# Altium PCB PCB1.PcbDoc
Units mm, origin at the board's own origin, x right, y up, seen from the top; angles counter-clockwise.
Board outline 40 x 26 mm, 2 copper layers (Top Layer, Bottom Layer); 62 components, 43 nets, 196 pads, 0 vias.
Unrouted connection lines stored in the file: 128.
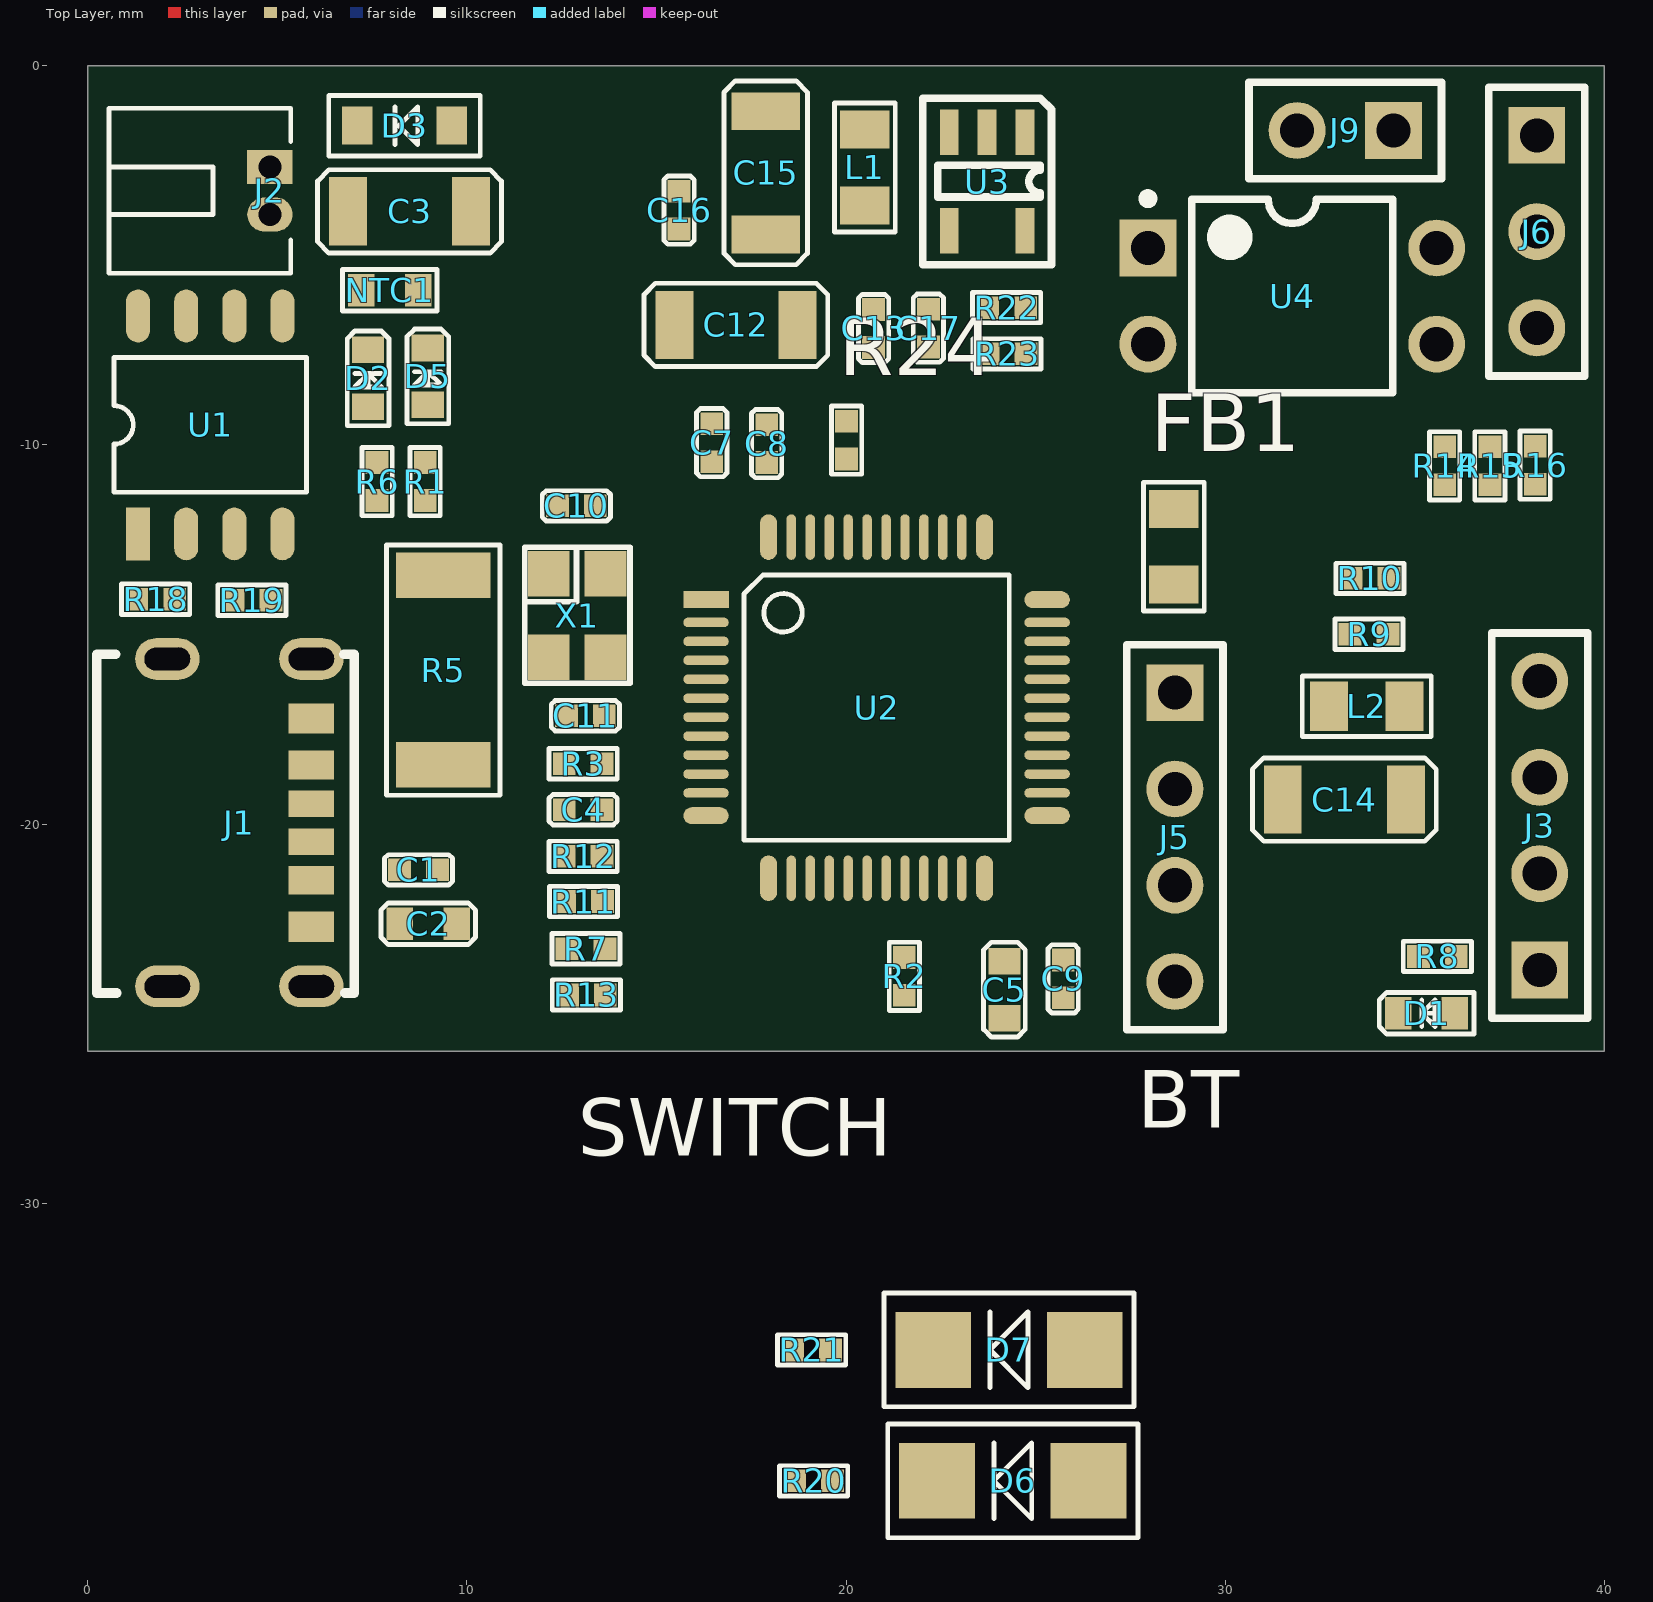
[diagram p0: Top Layer view]
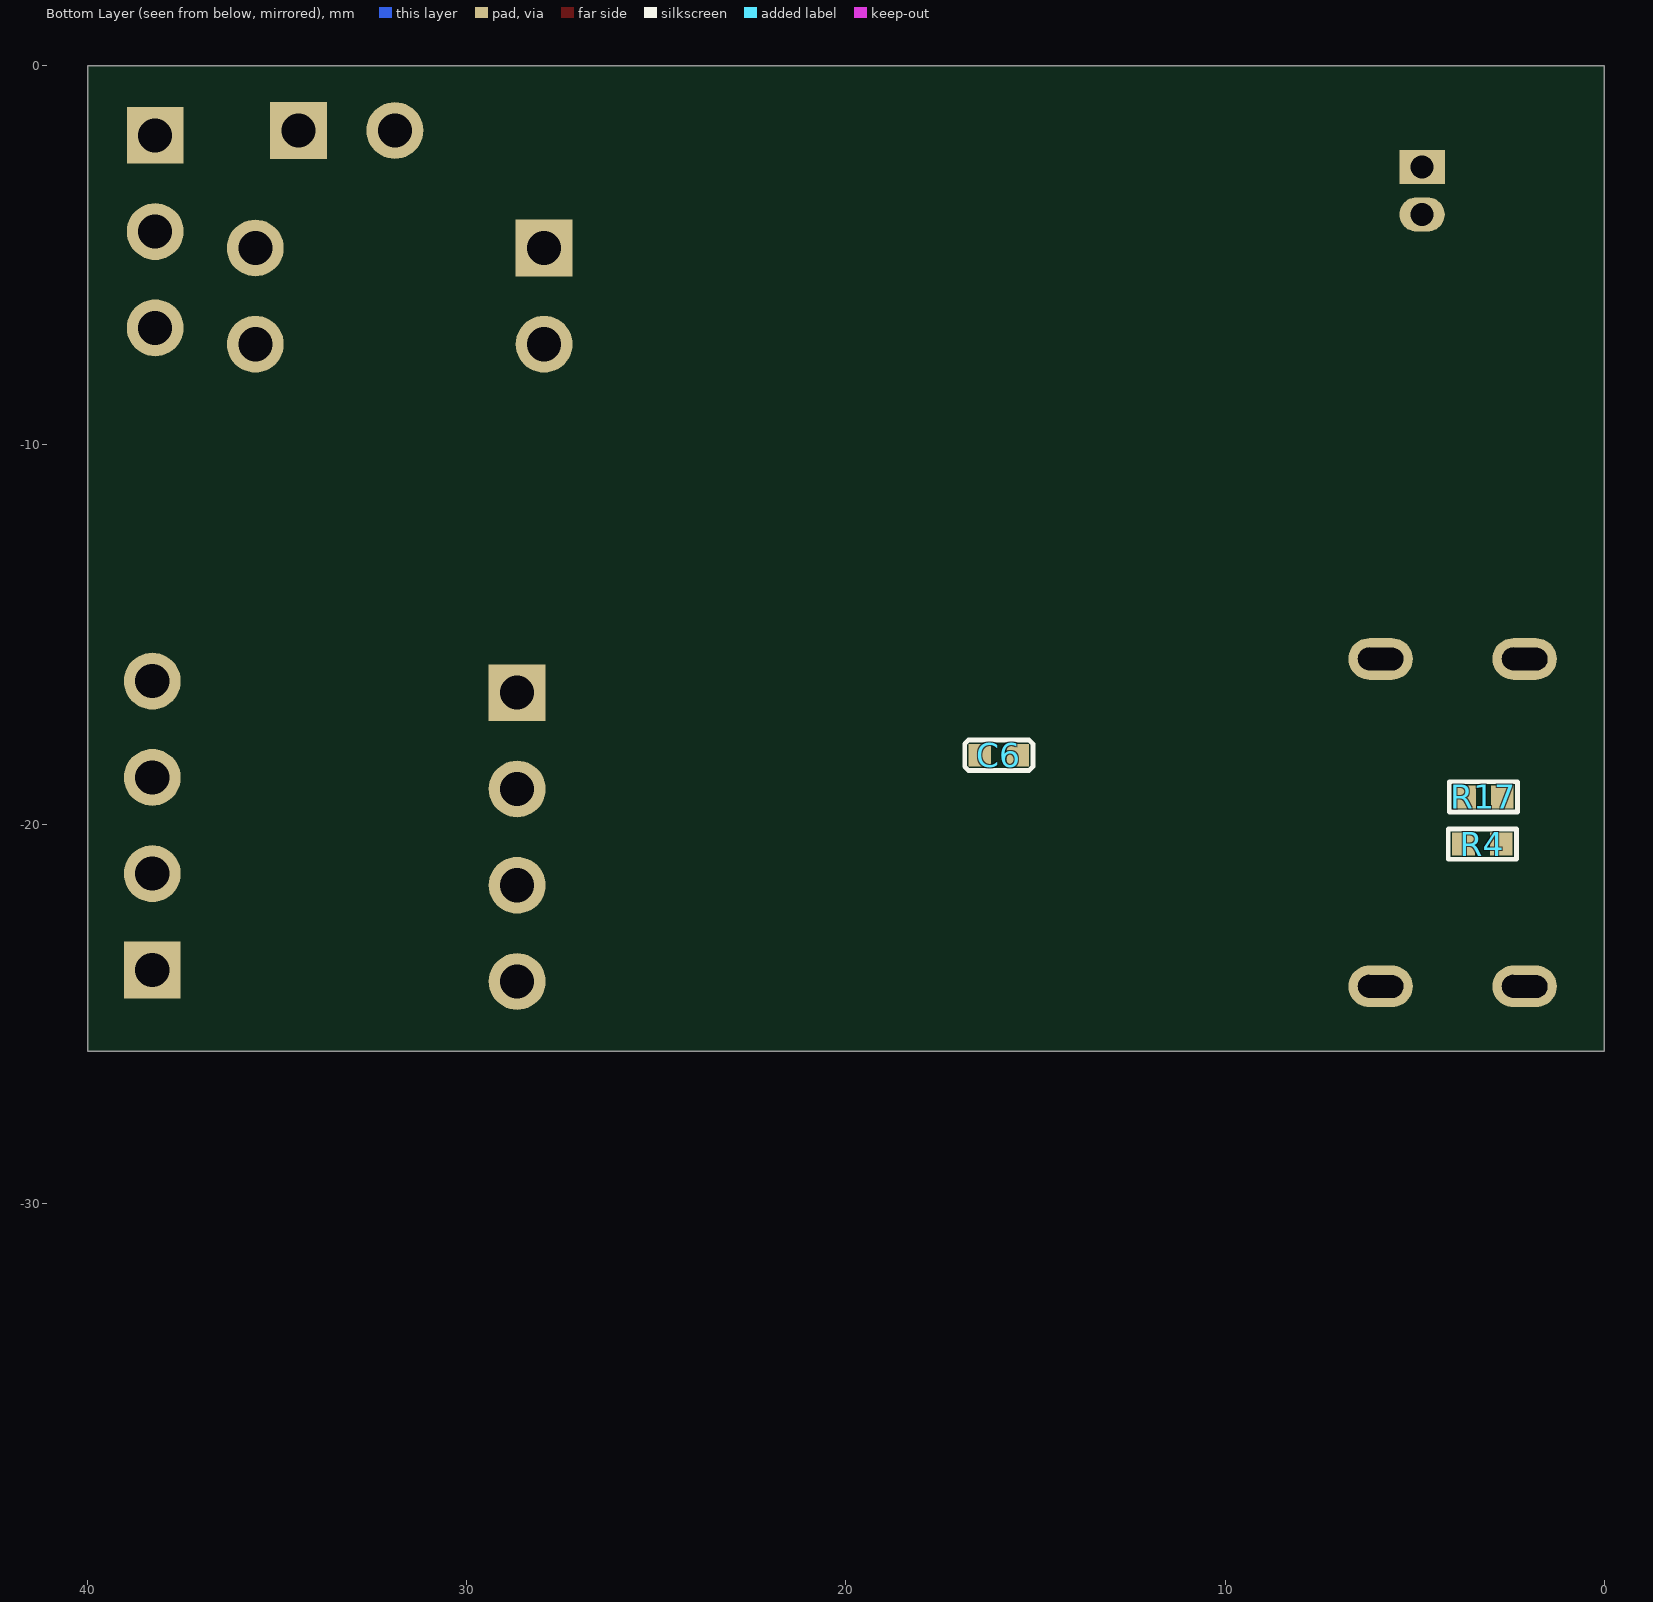
[diagram p1: Bottom Layer view, seen from below]

## Layer stack, top to bottom
Top Layer: signal copper 0.0356
Dielectric: dielectric 0.32, FR-4, Dk 4.8
Bottom Layer: signal copper 0.0356

## Board outline
0,-26 40,-26 40,0 0,0

## Design rules (kind name [scope] priority, off if disabled: settings)
Clearance [All] p1: gap=0.254
PolygonConnect [All] p1: connectstyle=Relief reliefconductorwidth=0.254 reliefentries=4 polygonreliefangle="90 Angle"
RoutingVias [All] p1: holewidth=0.711 width=1.27 viastyle="Through Hole" minholewidth=0.711 minwidth=1.27 maxholewidth=0.711 maxwidth=1.27
SilkscreenOverComponentPads [All] p1: minsilkscreentomaskgap=0.254
SolderMaskExpansion [All] p1: expansion=0.102
Width [All] p1: maxlimit=0.254 minlimit=0.254 preferedwidth=0.254
27 further rules are at their usual default settings.

## Classes and differential pairs
component class mcu: C4 C5 C6 C7 C8 C9 C10 C11 D1 FB1 J3 J5 J6 R2 R3 R7 R8 R9 R10 R11 R12 R13 R14 R15 R16 R24 S2 U2 U4 X1
component class power: C1 C2 C3 C12 C13 C14 C15 C16 C17 D2 D3 D5 D6 D7 J1 J2 J9 L1 L2 NTC1 R1 R4 R5 R6 R17 R18 R19 R20 R21 R22 R23 S3 U1 U3

## Components (designator, comment, footprint, x,y, rotation, side; value= is the part's Value field where it differs from the comment)
C1 "0.1uF/10V" 0402C 9.22,-21.209 r180 top
C2 "10uF/10V" 0603C 9.728,-22.631 r180 top
C3 "22uF/10V" 1206C 6.858,-3.835 r0 top
C4 "0.1uF/10V" 0402C 12.564,-19.625 r0 top
C5 "10uF/10V" 0603C 24.181,-25.121 r90 top
C6 "0.1uF/10V" 0402C 15.469,-18.186 r0 bottom
C7 "0.1uF/10V" 0402C 16.459,-9.439 r270 top
C8 "0.1uF/10V" 0402C 17.907,-9.465 r270 top
C9 "0.1uF/10V" 0402C 25.73,-24.587 r90 top
C10 "22P" 0402C 13.386,-11.606 r180 top
C11 "22P" 0402C 12.624,-17.145 r0 top
C12 "100uF/10v" 1206C 18.72,-6.833 r180 top
C13 "0.1uF/10V" 0402c 20.726,-6.426 r270 top
C14 "100uF/10v" 1206C 34.773,-19.355 r180 top
C15 "100uF/10V" 1206C 17.882,-1.194 r270 top
C16 "0.1uF/10V" 0402C 15.596,-3.302 r270 top
C17 "5pF/10V" 0402C 22.174,-7.417 r90 top
D1 "" 0603LED 36.068,-24.994 r180 top
D2 "" 0603LED 7.391,-8.992 r90 top
D3 "MM3Z5V1" SOD323 9.601,-1.575 r180 top
D5 "" 0603LED 8.966,-8.941 r90 top
D6 "SS14" SMA 26.401,-37.33 r180 top
D7 "SS14" SMA 26.3,-33.876 r180 top
FB1 "FB" 0805CZ 28.651,-11.684 r270 top
J1 "TYPE C_6P" TYPEC_6P 5.893,-19.964 r270 top
J2 "Header 2" 2X1.25MMW 4.801,-2.667 r270 top
J3 "Header 4" HDR1X4 38.303,-23.851 r90 top
J5 "Header 4" HDR1X4 28.677,-16.535 r270 top
J6 "Header 3" HDR1X3 38.227,-1.829 r270 top
J9 "Header 2" HDR1X2 34.442,-1.702 r180 top
L1 "4.7uH" 0805r 20.498,-1.676 r270 top
L2 "4.7uH" 0805r 32.741,-16.891 r0 top
NTC1 "SDN1608X103F3950FTF" 0603R 8.712,-5.918 r180 top
R1 "1K" 0402R 8.896,-10.465 r270 top
R2 "100K" 0402R 21.539,-23.52 r270 top
R3 "10K" 0402R 12.564,-18.412 r0 top
R4 "5.1K" 0402R 3.708,-20.53 r180 bottom
R5 "0.4/3/4W" 2010R 9.373,-18.44 r90 top
R6 "1K" 0402R 7.626,-10.465 r270 top
R7 "20K" 0402R 13.64,-23.292 r180 top
R8 "1K" 0402R 35.103,-23.495 r0 top
R9 "10K" 0402R 33.299,-14.992 r0 top
R10 "10K" 0402R 33.325,-13.519 r0 top
R11 "10K/1%" 0402R 12.573,-22.047 r0 top
R12 "10K/1%" 0402R 13.564,-20.853 r180 top
R13 "10K" 0402R 12.649,-24.511 r0 top
R14 "120" 0402R 35.795,-11.049 r90 top
R15 "10K" 0402R 36.989,-11.049 r90 top
R16 "10K" 0402R 38.183,-10.033 r270 top
R17 "5.1K" 0402R 3.683,-19.285 r180 bottom
R18 "5.6K/1%" 0402R 2.286,-14.072 r180 top
R19 "4K/1%" 0402R 4.826,-14.097 r180 top
R20 "10K" 0402R 19.645,-37.33 r180 top
R21 "10K" 0402R 19.594,-33.876 r180 top
R22 "24K/1%" 0402R 24.74,-6.375 r180 top
R23 "5.1K/1%" 0402R 23.749,-7.595 r0 top
R24 "100K" 0402R 20.015,-9.373 r270 top
U1 "TP4056" so-8 1.321,-12.344 r90 top
U2 "STM32F103C8T6" TQFP-48 16.307,-14.681 r0 top
U3 "PAM2312" SOT-23-5 23.724,-3.048 r270 top
U4 "PC817B" DIP-4 31.775,-6.071 r0 top
X1 "8M" XTAL4TN_3225 12.903,-14.502 r270 top

## Footprints (in the part's own frame and the unit in brackets; to place one, negate y for a bottom-side part, rotate by r counter-clockwise, add the part's x,y. Pads: shape width x height; smd on the part's side, far side on the other; paste and mask are expansions set on the pad)
2X1.25MMW [mm]
  rect 0.9x1.2 hole 0.6: 1(0,0)
  oval 0.9x1.2 hole 0.6: 2(1.25,0)
  silkscreen extent -1.55,-4.25 2.8,0.55
0402C [mm]
  rect 0.6x0.6 smd: 1(0,0) 2(1,0)
  silkscreen extent -0.4,-0.4 1.4,0.4
0402c [mm]
  rect 0.6x0.6 smd: 1(0,0) 2(1,0)
  silkscreen extent -0.4,-0.4 1.4,0.4
0402R [mm]
  rect 0.6x0.6 smd: 1(0,0) 2(1,0)
  silkscreen extent -0.4,-0.4 1.4,0.4
0603C [mm]
  rect 0.7x0.85 smd: 1(0,0) 2(1.5,0)
  silkscreen extent -0.5,-0.55 2,0.55
0603LED [mm]
  rect 0.7x0.85 smd: 1(0,0) 2(1.5,0)
  silkscreen extent -0.5,-0.55 2,0.55
0603R [mm]
  rect 0.7x0.85 smd: 1(0,0) 2(1.5,0)
  silkscreen extent -0.5,-0.55 2,0.55
0805CZ [mm]
  rect 1x1.3 smd: 1(0,0) 2(2,0)
  silkscreen extent -0.7,-0.8 2.7,0.8
0805r [mm]
  rect 1x1.3 smd: 1(0,0) 2(2,0)
  silkscreen extent -0.7,-0.8 2.7,0.8
1206C [mm]
  rect 1x1.8 smd: 1(0,0) 2(3.25,0)
  silkscreen extent -0.8,-1.1 4.05,1.1
2010R [mm]
  rect 1.2x2.5 smd: 1(0,0) 2(5,0)
  silkscreen extent -0.8,-1.5 5.8,1.5
DIP-4 [mm] "DIP; 4 Leads; Row Spacing 7.62 mm; Pitch 2.54 mm"
  rect 1.5x1.5 hole 0.9: 1(-3.81,1.27)
  round 1.5 hole 0.9: 2(-3.81,-1.27) 3(3.81,-1.27) 4(3.81,1.27)
  silkscreen extent -3.93,-2.55 2.65,2.69, body extent -3.15,-2.5 3.15,2.5, height 5.6
HDR1X2 [mm] "Connector; Header; 2 Position"
  rect 1.5x1.5 hole 0.9: 1(0,0)
  round 1.5 hole 0.9: 2(2.54,0)
  silkscreen extent -1.27,-1.27 3.81,1.27
HDR1X3 [mm] "Connector; Header; 3 Position"
  rect 1.5x1.5 hole 0.9: 1(0,0)
  round 1.5 hole 0.9: 2(2.54,0) 3(5.08,0)
  silkscreen extent -1.27,-1.27 6.35,1.27
HDR1X4 [mm] "Connector; Header; 4 Position"
  rect 1.5x1.5 hole 0.9: 1(0,0)
  round 1.5 hole 0.9: 2(2.54,0) 3(5.08,0) 4(7.62,0)
  silkscreen extent -1.27,-1.27 8.89,1.27
SMA [mm]
  rect 2x2 smd: 1(0,0) 2(4,0)
  silkscreen extent -1.3,-1.5 5.3,1.5
so-8 [mil]
  rect 55x25 smd: 1(0,0)
  oval 55x25 smd: 2(0,-50) 3(0,-100) 4(0,-150) 5(226.38,-150) 6(226.38,-100) 7(226.38,-50) 8(226.38,0)
  silkscreen extent 43,-175 183,25
SOD323 [mm]
  rect 0.8x1 smd: 1(0,0) 2(2.5,0)
  silkscreen extent -0.75,-0.8 3.25,0.8
SOT-23-5 [mm]
  rect 1.2x0.5 smd: 1(-1.3,1) 2(-1.3,0) 3(-1.3,-1) 4(1.3,-1) 5(1.3,1)
  silkscreen extent -2.2,-1.7 2.2,1.7
TQFP-48 [mm]
  rect 1.2x0.45 smd: 1(0,0.6)
  oval 1.2x0.25 smd: 2(0,0) 3(0,-0.5) 4(0,-1) 5(0,-1.5) 6(0,-2) 7(0,-2.5) 8(0,-3) 9(0,-3.5) 10(0,-4) 11(0,-4.5) 26(9,-4.5) 27(9,-4) 28(9,-3.5) 29(9,-3) 30(9,-2.5) 31(9,-2) 32(9,-1.5) 33(9,-1) 34(9,-0.5) 35(9,0)
  oval 1.2x0.45 smd: 12(0,-5.1) 25(9,-5.1) 36(9,0.6)
  oval 0.45x1.2 smd: 13(1.65,-6.75) 24(7.35,-6.75) 37(7.35,2.25) 48(1.65,2.25)
  oval 0.25x1.2 smd: 14(2.25,-6.75) 15(2.75,-6.75) 16(3.25,-6.75) 17(3.75,-6.75) 18(4.25,-6.75) 19(4.75,-6.75) 20(5.25,-6.75) 21(5.75,-6.75) 22(6.25,-6.75) 23(6.75,-6.75) 38(6.75,2.25) 39(6.25,2.25) 40(5.75,2.25) 41(5.25,2.25) 42(4.75,2.25) 43(4.25,2.25) 44(3.75,2.25) 45(3.25,2.25) 46(2.75,2.25) 47(2.25,2.25)
  silkscreen extent 1,-5.75 8,1.25
TYPEC_6P [mm]
  oval 1.1x1.7 hole 0.6 slot 1.2 at 90.6 deg: 1(-4.32,0) 1(-4.32,-3.8) 1(4.32,0) 1(4.32,-3.8)
  rect 0.7x1.2 smd: A5(-0.5,0) B5(0.5,0)
  rect 0.76x1.2 smd: A9(1.52,0) B9(-1.52,0)
  rect 0.8x1.2 smd: A12(2.75,0) B12(-2.75,0)
  silkscreen extent -4.44,-5.66 4.49,1.14
XTAL4TN_3225 [mm]
  rect 1.2x1.1 smd: 1(-1.1,-0.75) 2(1.1,-0.75) 3(1.1,0.75) 4(-1.1,0.75)
  silkscreen extent -1.8,-1.38 1.79,1.4

## Part data
C1 C2 C3 C4 C5 C6 C7 C8 C9 C10 C11 C12 C13 C14 C15 C16 C17: library part Cap, "Capacitor"
D1 D2 D5: library part LED0, "Typical INFRARED GaAs LED"
D3: library part "D Tunnel1", "Tunnel Diode - RLC Model"
D6 D7: library part Diode, "Default Diode"
FB1: "BLM21PG331SN1D"
J2 J9: "Header, 2-Pin"
J3 J5: "Header, 4-Pin"
J6: "Header, 3-Pin"
L1 L2: library part Inductor, "Inductor"
NTC1 R1 R3 R4 R5 R6 R7 R8 R9 R10 R11 R12 R13 R14 R15 R16 R17 R18 R19 R20 R21 R22 R23: library part "Res Semi", "Semiconductor Resistor"
R2 R24: library part Res1, "Resistor"
U2: library part STM32F103C6
U4: library part Optoisolator1, "4-Pin Phototransistor Optocoupler"
X1: library part CRYSTAL-4

## Nets (pads, with @x,y where several pads share a name; then routed paths per layer and width w, separated by ;. In a path a pad name is that pad's centre, name@x,y a point inside that pad or via, vN(x,y) a via of type N, cw(c..) or ccw(c..) an arc to the next point about the centre after c; other vN are vias at no path point)
AD_BAT_IN: R11.2 R12.1 U2.10
BATTERY: C3.1 C12.1 C13.1 D3.2 D7.1 J2.1 R11.1 R13.1 U1.5 U3.4
DM: U2.32
DP: U2.33
GND: C1.1 C2.1 C3.2 C4.1 C5.1 C6.1 C7.1 C8.1 C9.1 C10.1 C11.1 C12.2 C13.2 C14.2 C15.1 C16.1 D1.2 D3.1 J1.1 J1.A12 J1.B12 J2.2 J3.2 J5.2 J9.2 NTC1.2 R4.2 R7.2 R12.2 R16.1 R17.2 R19.1 R23.1 R24.1 U1.3 U2.8 U2.23 U2.35 U2.47 U3.2
LED: D1.1 R8.2
NetC17_1: C17.1 R22.1 R23.2 U3.5
NetD2_1: D2.1 R6.1
NetD2_2: D2.2 U1.7
NetD5_1: D5.1 R1.1
NetD5_2: D5.2 U1.6
NetD6_2: D6.2 R20.1
NetD7_2: D7.2 R21.1
NetFB1_2: FB1.2 J5.1
NetJ1_A5: J1.A5 R17.1
NetJ1_B5: J1.B5 R4.1
NetJ6_1: J6.1 U4.4
NetJ6_2: J6.2 U4.3
NetJ6_3: J6.3 R15.2
NetL1_1: L1.1 U3.3
NetNTC1_1: NTC1.1 R18.2 U1.1
NetR1_2: R1.2 R5.2 R6.2 R18.1 U1.4 U1.8
NetR2_1: R2.1 U2.20
NetR7_1: R7.1 R13.2
NetR8_1: R8.1 U2.46
NetR14_2: R14.2 U4.2
NetR19_2: R19.2 U1.2
NetR20_2: R20.2 R21.2
NetR24_2: R24.2 U2.44
NetS2_2: U2.25
NetS3_2: U3.1
NRST: C4.2 R3.2 U2.7
OSCIN: C10.2 U2.5 X1.1
OSCOUT: C11.2 U2.6 X1.3
PEN_LED_IN: R15.1 R16.2 U2.18
PEN_SWITCH_OUT: R14.1 U2.17
RXD2: J5.4 U2.13
SWCLK: J3.3 R9.2 U2.37
SWDIO: J3.4 R10.2 U2.34
TXD2: J5.3 U2.12
VCC_3.3V: C5.2 C6.2 C7.2 C8.2 C9.2 C15.2 C16.2 C17.2 FB1.1 J3.1 L1.2 L2.1 R2.2 R3.1 R9.1 R10.1 R22.2 U2.1 U2.9 U2.24 U2.36 U2.48 U4.1
VOUT: C14.1 J9.1 L2.2
VUSB_5V: C1.2 C2.2 D6.1 J1.A9 J1.B9 R5.1
pads on no net: U2.2 U2.3 U2.4 U2.11 U2.14 U2.15 U2.16 U2.19 U2.21 U2.22 U2.26 U2.27 U2.28 U2.29 U2.30 U2.31 U2.38 U2.39 U2.40 U2.41 U2.42 U2.43 U2.45 X1.2 X1.4

## Silkscreen, mask and mechanical layers (free items; w line width, h text height)
Top Overlay:
  text "BATTERY" at -13.132,-3.861 h1.52
  text "USB" at -6.452,-20.066 h1.52
  text "SWD" at 42.57,-21.59 h1.52
  text "BT" at 27.686,-28.016 h1.52
  text "SWITCH" at 12.929,-28.753 h1.52
Mechanical 1:
  the board outline again, w0.254

## Dimensions
0,-26 to 40,-26 on Mechanical 1
-0.686,0.076 to 0,-26 on Mechanical 1